# Altium PCB Copy of PCB1.PcbDoc
Units mm, origin at the board's own origin, x right, y up, seen from the top; angles counter-clockwise.
Board outline 235.2 x 133.73 mm, 2 copper layers (Top Layer, Bottom Layer); 78 components, 85 nets, 276 pads, 1 vias.
Unrouted connection lines stored in the file: 3.
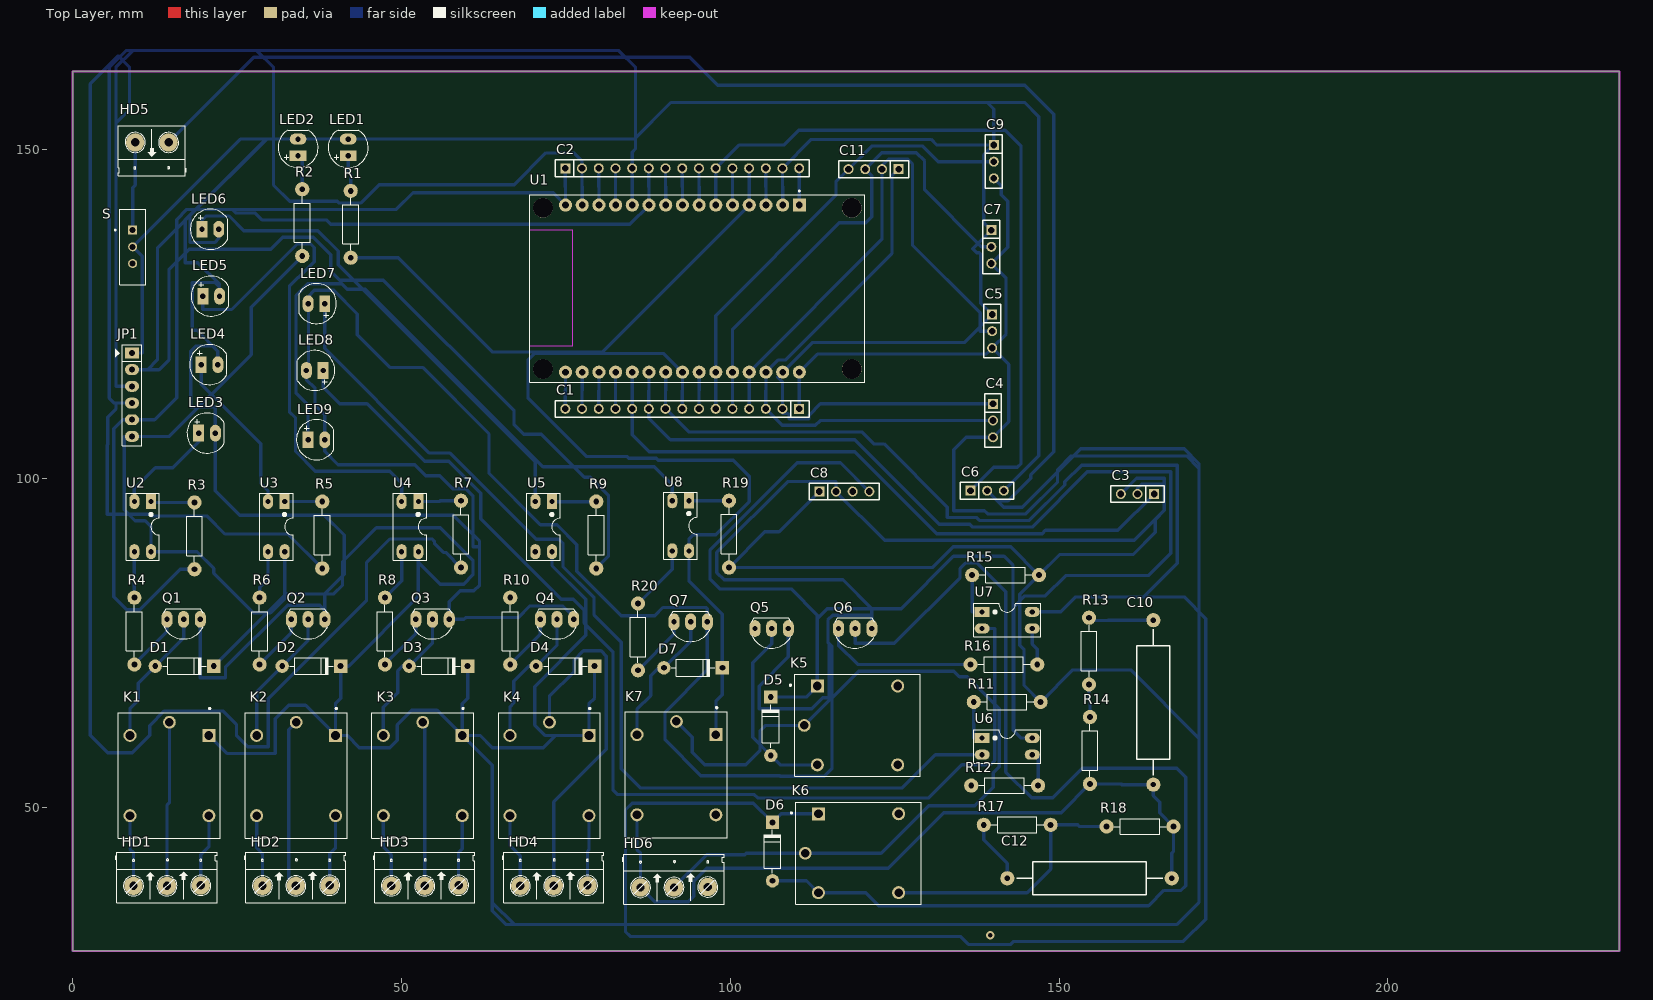
[diagram p0: Top Layer view]
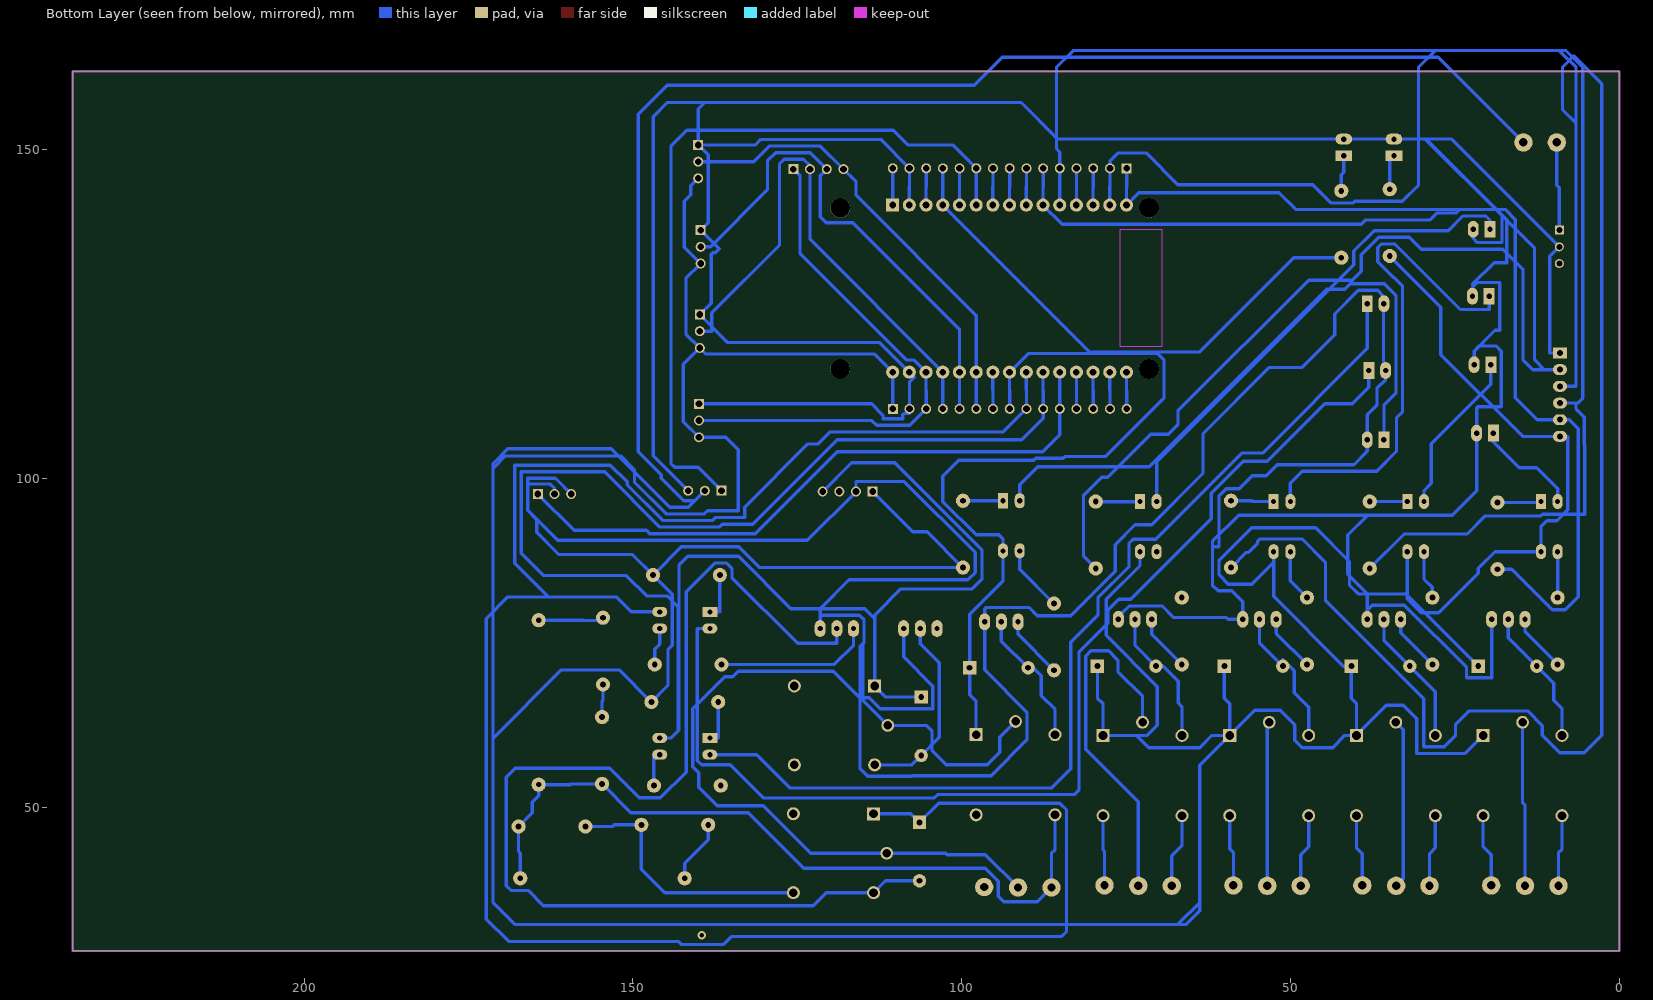
[diagram p1: Bottom Layer view, seen from below]

## Layer stack, top to bottom
Top Solder: solder mask 0.0102, Solder Resist, Dk 3.5
Top Layer: signal copper 0.0356
Dielectric 1: dielectric 0.32, FR-4, Dk 4.8
Bottom Layer: signal copper 0.0356
Bottom Solder: solder mask 0.0102, Solder Resist, Dk 3.5

## Board outline
0,28.194 235.204,28.194 235.204,161.925 0,161.925

## Design rules (kind name [scope] priority, off if disabled: settings)
Clearance [All] p1: gap=0.5 ignorepadtopadclearanceinfootprint=FALSE
PolygonConnect [All] p1: connectstyle=Relief reliefconductorwidth=0.254 reliefentries=4 polygonreliefangle="90 Angle" airgapwidth=0.254
RoomDefinition Sheet2 [InComponentClass('Sheet2')] p1: confinementstyle=ConfineIn formatcopy=TRUE lockcomponents=FALSE outline 236.347,29.718 243.84,29.718 243.84,42.164 236.347,42.164
RoutingLayers [All] p1: top layer_v5=FALSE bottom layer_v5=TRUE
RoutingVias [All] p1: holewidth=0.711 width=1.27 viastyle="Through Hole" minholewidth=0.711 minwidth=1.27 maxholewidth=0.711 maxwidth=1.27
SolderMaskExpansion [All] p1: expansion=0.102 istentingtop=FALSE
Width [All] p1: maxlimit=0.7 minlimit=0.3 preferedwidth=0.5
29 further rules are at their usual default settings.

## Components (designator, comment, footprint, x,y, rotation, side; value= is the part's Value field where it differs from the comment)
C1 "JP15" JP15-C1T 110.49,110.617 r180 top
C2 "JP15" JP15-C1T 74.93,147.193 r0 top
C3 "IR Remote" JP3-C1T 164.465,97.663 r180 top
C4 "Switch1" JP3-C1T 139.954,111.379 r270 top
C5 "Switch2" JP3-C1T 139.827,124.968 r270 top
C6 "DHT11" JP3-C1T 136.525,98.171 r0 top
C7 "Switch3" JP3-C1T 139.7,137.795 r270 top
C8 "GAS" JP4-C1T 113.538,98.044 r0 top
C9 "Switch4" JP3-C1T 140.081,150.749 r270 top
C10 "2.2uF/450V" Capacitor_CBB 164.338,53.486 r90 top value=220uF/450V
C11 "JP4" JP4-C1T 125.603,147.066 r180 top
C12 "3.3uF/450V" Capacitor_CBB 167.132,39.243 r180 top value=220uF/450V
D1 "1N4007" D1A 12.573,71.501 r180 top
D2 "1N4007" D1A 31.877,71.501 r180 top
D3 "1N4007" D1A 51.181,71.501 r180 top
D4 "1N4007" D1A 70.485,71.501 r180 top
D5 "1N4007" D1A 106.172,57.912 r270 top
D6 "1N4007" D1A 106.426,38.862 r270 top
D7 "1N4007" D1A 89.916,71.247 r180 top
HD1 "Header 3" HED3 9.271,38.1 r0 top
HD2 "Header 3" HED3 28.871,38.1 r0 top
HD3 "Header 3" HED3 48.472,38.1 r0 top
HD4 "Header 3" HED3 68.072,38.1 r0 top
HD5 "Header 2" HED2 14.605,151.13 r180 top
HD6 "Header 3" HED3 86.36,37.846 r0 top
JP1 "JP6 PIN" JP6 9.04,119.126 r270 top value=JP7
K1 "SRD-05VDC-SL-C" RELAY_SRD-05VDC-SL-C 14.732,54.864 r270 top
K2 "SRD-05VDC-SL-C" RELAY_SRD-05VDC-SL-C 33.994,54.864 r270 top
K3 "SRD-05VDC-SL-C" RELAY_SRD-05VDC-SL-C 53.255,54.864 r270 top
K4 "SRD-05VDC-SL-C" RELAY_SRD-05VDC-SL-C 72.517,54.864 r270 top
K5 "SRD-05VDC-SL-C" RELAY_SRD-05VDC-SL-C 119.352,62.484 r0 top
K6 "SRD-05VDC-SL-C" RELAY_SRD-05VDC-SL-C 119.507,43.053 r0 top
K7 "SRD-05VDC-SL-C" RELAY_SRD-05VDC-SL-C 91.821,54.991 r270 top
LED1 "LED_WIFI" "LED-5 GRe" 41.91,149.098 r90 top value="LED 3 ly Single Colour"
LED2 "LED_POWER" "LED-5 GRe" 34.29,149.098 r90 top value="LED 3 ly Single Colour"
LED3 "LED" "LED-5 GRe" 19.177,106.934 r0 top value="LED 3 ly Single Colour"
LED4 "LED_RELAY2_ON" "LED-5 GRe" 19.558,117.348 r0 top value="LED 3 ly Single Colour"
LED5 "LED" "LED-5 GRe" 19.812,127.762 r0 top value="LED 3 ly Single Colour"
LED6 "LED" "LED-5 GRe" 19.685,137.922 r0 top value="LED 3 ly Single Colour"
LED7 "LED" "LED-5 GRe" 38.354,126.619 r180 top value="LED 3 ly Single Colour"
LED8 "LED" "LED-5 GRe" 38.1,116.459 r180 top value="LED 3 ly Single Colour"
LED9 "LED" "LED-5 GRe" 35.814,105.918 r0 top value="LED 3 ly Single Colour"
Q1 "2SC1815" TO92-123 16.891,78.613 r180 top value=C1815
Q2 "2SC1815" TO92-123 35.814,78.613 r180 top value=C1815
Q3 "2SC1815" TO92-123 54.737,78.613 r180 top value=C1815
Q4 "2SC1815" TO92-123 73.66,78.613 r180 top value=C1815
Q5 "2SC1815" TO92-123 106.299,77.216 r180 top value=C1815
Q6 "2SC1815" TO92-123 118.999,77.216 r180 top value=C1815
Q7 "2SC1815" TO92-123 93.98,78.232 r180 top value=C1815
R1 "Res" RES-1/4W 42.164,138.303 r270 top
R2 "Res" RES-1/4W 34.798,138.557 r270 top
R3 "Res" RES-1/4W 18.415,90.932 r270 top
R4 "Res" RES-1/4W 9.271,76.454 r270 top
R5 "Res" RES-1/4W 37.846,91.059 r270 top
R6 "Res" RES-1/4W 28.321,76.454 r270 top
R7 "Res" RES-1/4W 58.928,91.186 r270 top
R8 "Res" RES-1/4W 47.371,76.454 r270 top
R9 "Res" RES-1/4W 79.502,91.059 r270 top
R10 "Res" RES-1/4W 66.421,76.454 r270 top
R11 "Res" RES-1/4W 141.732,66.167 r180 top
R12 "Res" RES-1/4W 141.351,53.467 r180 top
R13 "Res" RES-1/4W 154.686,74.168 r90 top
R14 "Res" RES-1/4W 154.559,58.293 r270 top
R15 "Res" RES-1/4W 141.478,85.471 r180 top
R16 "Res" RES-1/4W 141.224,71.882 r180 top
R17 "Res" RES-1/4W 143.256,47.498 r180 top
R18 "Res" RES-1/4W 162.687,46.99 r0 top
R19 "Res" RES-1/4W 99.949,91.948 r90 top
R20 "Res" RES-1/4W 85.852,75.565 r270 top
S "SS-12E17" SW_SS-12E17 9.144,135.255 r0 top
U1 "ESP32-DEVKIT-V1" MODULE_ESP32_DEVKIT_V1 94.996,128.905 r270 top
U2 "PC817" DIP4/W0.3 11.938,96.52 r180 top
U3 "PC817" DIP4/W0.3 32.258,96.52 r180 top
U4 "PC817" DIP4/W0.3 52.578,96.52 r180 top
U5 "PC817" DIP4/W0.3 72.898,96.52 r180 top
U6 "PC817" DIP4/W0.3 138.303,60.579 r270 top
U7 "PC817" DIP4/W0.3 138.303,79.756 r270 top
U8 "PC817" DIP4/W0.3 93.726,96.647 r180 top

## Footprints (in the part's own frame and the unit in brackets; to place one, negate y for a bottom-side part, rotate by r counter-clockwise, add the part's x,y. Pads: shape width x height; smd on the part's side, far side on the other; paste and mask are expansions set on the pad)
Capacitor_CBB [mil]
  round 85 hole 31.5: 1(0,0) 2(984.25,0)
  silkscreen extent 55,-98 929,98, body extent -51,-165 1031,170, height 649
D1A [mil] "Diode 1A, W 100mil, L 350mil"
  round 80 hole 35: 1(0,0)
  rect 80x80 hole 35: 2(-350,0)
  silkscreen extent -305,-50 -45,50, body extent -386,-33 34,36, height 84
DIP4/W0.3 [mil] "4 PIN, W 300mil, Pin to pin 100mil"
  rect 60x90 hole 31: 1(0,0)
  oval 60x90 hole 31: 2(100,0) 3(100,300) 4(0,300)
  silkscreen extent -50,-50 150,350, body extent -59,-10 159,305, height 170
HED2 [mil] "Header 2, 2 pin, hight 300mil, Pin to Pin 200, Colour Green"
  round 110 hole 50: 1(0,0) 2(200,0)
  silkscreen extent -106,-100 300,200, body extent -92,-140 302,155, height 394
HED3 [mil] "Header 3, 3 pin, hight 300mil, Pin to Pin 200, Colour Green"
  round 110 hole 50: 1(0,0) 2(200,0) 3(402.62,2.62)
  silkscreen extent -106,-100 500,200
JP3-C1T [mm] "3 row, straight, gold plating"
  rect 1.52x1.52 hole 1.02: 1(0,0)
  round 1.52 hole 1.02: 2(2.54,0) 3(5.08,0)
  silkscreen extent -1.52,-1.27 6.6,1.27, body extent -1.52,-1.25 6.6,1.25, height 8.51
JP4-C1T [mm] "4 row, straight, gold plating"
  rect 1.52x1.52 hole 1.02: 1(0,0)
  round 1.52 hole 1.02: 2(2.54,0) 3(5.08,0) 4(7.62,0)
  silkscreen extent -1.52,-1.27 9.14,1.27, body extent -1.52,-1.25 9.14,1.25, height 8.51
JP6 [mil] "JP6"
  rect 65x85 hole 36: 1(0,0)
  oval 65x85 hole 36: 2(100,0) 3(200,0) 4(300,0) 5(400,0) 6(500,0)
  silkscreen extent -50,-99 556,58, body extent -48,-50 548,48, height 323
JP15-C1T [mm] "15 row, straight, gold plating"
  rect 1.52x1.52 hole 1.02: 1(0,0)
  round 1.52 hole 1.02: 2(2.54,0) 3(5.08,0) 4(7.62,0) 5(10.16,0) 6(12.7,0) 7(15.24,0) 8(17.78,0) 9(20.32,0) 10(22.86,0) 11(25.4,0) 12(27.94,0) 13(30.48,0) 14(33.02,0) 15(35.56,0)
  silkscreen extent -1.52,-1.27 37.08,1.27, body extent -1.52,-1.25 36.58,1.25, height 8.51
"LED-5 GRe" [mil] "LED 2 PIN, 5 ly , Only colour,pin to pin 100mil"
  rect 65x100 hole 32: 1(0,0)
  oval 65x100 hole 32: 2(100,0)
  silkscreen extent -70,-120 154,120, body extent -54,-104 154,105, height 337
MODULE_ESP32_DEVKIT_V1 [mm]
  rect 2x2 / inner round 2 / far side rect 2x2 hole 1.02: 1(-12.7,15.515)
  round 2 hole 1.02: 2(-12.7,12.975) 3(-12.7,10.435) 4(-12.7,7.895) 5(-12.7,5.355) 6(-12.7,2.815) 7(-12.7,0.275) 8(-12.7,-2.265) 9(-12.7,-4.805) 10(-12.7,-7.345) 11(-12.7,-9.885) 12(-12.7,-12.425) 13(-12.7,-14.965) 14(-12.7,-17.505) 15(-12.7,-20.045) 16(12.7,-20.045) 17(12.7,-17.505) 18(12.7,-14.965) 19(12.7,-12.425) 20(12.7,-9.885) 21(12.7,-7.345) 22(12.7,-4.805) 23(12.7,-2.265) 24(12.7,0.275) 25(12.7,2.815) 26(12.7,5.355) 27(12.7,7.895) 28(12.7,10.435) 29(12.7,12.975) 30(12.7,15.515)
  round 3 hole 3 unplated: ""(-12.28,23.475) ""(-12.28,-23.475) ""(12.23,23.475) ""(12.23,-23.475)
  Keep-Out Layer region: 8.78,-25.475 -8.91,-25.475 -8.91,-18.985 8.78,-18.985
  Keep-Out Layer region: 8.78,-25.475 -8.91,-25.475 -8.91,-18.985 8.78,-18.985
  silkscreen extent -14.95,-25.47 14.23,25.47
RELAY_SRD-05VDC-SL-C [mm]
  rect 1.98x1.98 / inner round 1.98 / far side rect 1.98x1.98 hole 1.32: A1(-6.1,6)
  round 1.98 hole 1.32: A2(-6.1,-6) NC(6.1,6) NO(6.1,-6)
  round 1.935 hole 1.29: COM(-8.1,0)
  silkscreen extent -10.3,-7.75 9.55,7.75, body extent -9.6,-7.8 9.6,7.8, height 15.8
RES-1/4W [mil]
  round 85 hole 35: 1(-215,5) 2(185,5)
  silkscreen extent -173,-42 141,52, body extent -227,-42 197,52, height 95
SW_SS-12E17 [mm]
  rect 1.37x1.37 hole 0.91: 1(0,2.54)
  round 1.37 hole 0.91: 2(0,0) 3(0,-2.54)
  silkscreen extent -2.75,-5.75 2,5.75
TO92-123 [mil] "TO-92"
  oval 66x100 hole 32: 1(-100,0) 2(0,0) 3(100,0)
  silkscreen extent -117,-65 120,118, body extent -109,-66 109,95, height 245

## Part data
C1 C2: "WR-PHD 2.54 mm Angled Socket Header", Manufacturer="W¨¹rth Elektronik eiSos GmbH", partNo=613015143121, ComponentLink1 Description=Manufacturer, ComponentLink1URL=http://www.we-online.com, ComponentLink2 Description=Datasheet, ComponentLink2URL=http://katalog.we-online.de/em/datasheet/6130xx143121.pdf, Created by="Karrer Zheng", Created Date="29 March 2013", NoPins=15
C3 C4 C5 C6 C7 C9: library part JP3, "WR-PHD 2.54 mm Angled Socket Header", Manufacturer="W¨¹rth Elektronik eiSos GmbH", partNo=613003143121, ComponentLink1 Description=Manufacturer, ComponentLink1URL=http://www.we-online.com, ComponentLink2 Description=Datasheet, ComponentLink2URL=http://katalog.we-online.de/em/datasheet/6130xx143121.pdf, Created by="Karrer Zheng", Created Date="29 March 2013", NoPins=03
C8: library part JP4, "WR-PHD 2.54 mm Angled Socket Header", Manufacturer="W¨¹rth Elektronik eiSos GmbH", partNo=613004143121, ComponentLink1 Description=Manufacturer, ComponentLink1URL=http://www.we-online.com, ComponentLink2 Description=Datasheet, ComponentLink2URL=http://katalog.we-online.de/em/datasheet/6130xx143121.pdf, Created by="Karrer Zheng", Created Date="29 March 2013", NoPins=04
C10 C12: library part CP9, "Cap 10000uF/63V"
C11: "WR-PHD 2.54 mm Angled Socket Header", Manufacturer="W¨¹rth Elektronik eiSos GmbH", partNo=613004143121, ComponentLink1 Description=Manufacturer, ComponentLink1URL=http://www.we-online.com, ComponentLink2 Description=Datasheet, ComponentLink2URL=http://katalog.we-online.de/em/datasheet/6130xx143121.pdf, Created by="Karrer Zheng", Created Date="29 March 2013", NoPins=04
D1 D2 D3 D4 D5 D6 D7: library part D1A, "Diode 1A"
HD1 HD2 HD3 HD4 HD6: library part Hed3, "Header 3 (Green)"
HD5: library part Hed2, "Header 2 (Green)"
JP1: library part JP6
K1 K2 K3 K4 K5 K6 K7: "5V Trigger Relay Module For Arduino And Raspberry Pi 5V Trigger Relay Module For Arduino And Raspberry Pi", Package="NON STANDARD-5 Songle Relay", Availability="Not in stock", Check_prices=https://www.snapeda.com/parts/SRD-05VDC-SL-C/Songle+Relay/view-part/?ref=eda, MF="Songle Relay", MP=SRD-05VDC-SL-C, Price=None, SnapEDA_Link=https://www.snapeda.com/parts/SRD-05VDC-SL-C/Songle+Relay/view-part/?ref=snap
LED1 LED2 LED4: library part LED, "LED Single colour Green and Red"
LED3 LED5 LED6 LED7 LED8 LED9: "LED Single colour Green and Red"
Q1 Q2 Q3 Q4 Q5 Q6 Q7: "NPN 600mW, ECB"
R1 R2 R3 R4 R5 R6 R7 R8 R9 R10 R11 R12 R13 R14 R15 R16 R17 R18 R19 R20: Manufacturer="Generic Components", Class=Passive, Published=08/06/2000, Publisher="Altium Hobart Technology Centre", SubClass=R
S: "3-Pin SPDT Slide Switch", Package=None, Availability=Unavailable, MF="Jameco Valuepro", MP=SS-12E17, Price=None, SnapEDA_Link=https://www.snapeda.com/parts/SS-12E17/Jameco%20Valuepro/view-part/842561/?ref=snap
U1: "Dual core, Wi-Fi: 2.4 GHz up to 150 Mbits/s,BLE (Bluetooth Low Energy) and legacy Bluetooth, 32 bits, Up to 240 MHz", Package=None, Availability="Not in stock", Check_prices=https://www.snapeda.com/parts/ESP32-DEVKIT-V1/Do+it/view-part/?ref=eda, MF="Do it", MP=ESP32-DEVKIT-V1, Price=None, SnapEDA_Link=https://www.snapeda.com/parts/ESP32-DEVKIT-V1/Do+it/view-part/?ref=snap
U2 U3 U4 U5 U6 U7 U8: "Single Opto"

## Via types
v1: diameter 1.27, hole 0.711, Top Layer to Bottom Layer, 1 vias

## Nets (pads, with @x,y where several pads share a name; then routed paths per layer and width w, separated by ;. In a path a pad name is that pad's centre, name@x,y a point inside that pad or via, vN(x,y) a via of type N, cw(c..) or ccw(c..) an arc to the next point about the centre after c; other vN are vias at no path point)
3.3V: C2.15 U1.1 | length 5.6
  Bottom Layer w0.5: C2.15 110.49,144.395 110.511,144.374 U1.1
D2: C2.12 R1.2 U1.4 | length 81.4
  Bottom Layer w0.5: R1.2 49.556,133.604 63.907,119.253 80.539,119.253 U1.4 102.891,144.374 102.87,144.395 C2.12
D4: C2.11 U1.5 | length 5.6
  Bottom Layer w0.5: C2.11 100.33,144.395 100.351,144.374 U1.5
D5: C2.8 U1.8 | length 5.6
  Bottom Layer w0.5: C2.8 92.71,144.395 92.731,144.374 U1.8
D12: C1.4 C5.2 C11.2 U1.27 | length 82.2
  Bottom Layer w0.5: C1.4 102.87,113.386 102.891,113.407 U1.27 123.063,136.377 C11.2 123.063,147.574 124.065,148.576 127,148.576 127.711,147.865 127.711,135.509 138.024,125.197 138.024,122.428 C5.2
D13: C1.3 C4.2 C11.1 U1.28 | length 81.4
  Bottom Layer w0.5: C11.1 124.587,146.05 124.587,134.235 108.386,118.034 107.26,118.034 U1.28 105.431,114.3 105.431,113.407 105.41,113.386 C1.3 107.92,108.107 112.954,108.107 113.686,108.839 C4.2
D14: C1.5 C7.2 C11.3 U1.26 | length 76.8
  Bottom Layer w0.5: C1.5 100.33,113.386 100.351,113.407 U1.26 100.351,122.703 116.561,138.913 120.625,138.913 121.539,139.827 121.539,146.05 C11.3 123.038,149.581 128.27,149.581 129.54,148.311 129.54,143.916 138.201,135.255 C7.2
D15: C2.13 U1.3 | length 5.6
  Bottom Layer w0.5: C2.13 105.41,144.395 105.431,144.374 U1.3
D18: C2.7 U1.9 | length 5.6
  Bottom Layer w0.5: C2.7 90.17,144.395 90.191,144.374 U1.9
D19: C2.6 JP1.2 R9.2 U1.10 | length 226
  Bottom Layer w0.5: R9.2 81.483,88.214 81.483,97.485 78.74,100.228 77.826,100.228 71.298,106.756 68.58,106.756 67.132,108.204 67.132,110.312 47.269,130.175 40.64,130.175 39.268,131.547 39.268,134.061 36.627,136.703 31.953,136.703 30.152,134.902 17.732,134.902 14.681,131.851 14.681,118.11 13.157,116.586 JP1.2 11.43,116.586 12.903,118.059 12.903,135.052 18.796,140.945 24.257,140.945 24.79,140.411 27.737,140.411 28.804,139.344 38.608,139.344 39.243,138.709 84.755,138.709 U1.10 87.651,144.374 87.63,144.395 C2.6
D21: C2.5 JP1.3 R7.2 U1.11 | length 399.5
  Bottom Layer w0.5: R7.2 56.747,88.795 56.4,88.795 55.024,90.17 55.024,90.518 54.712,90.83 48.26,90.83 44.704,87.274 44.704,81.509 29.743,66.548 29.743,59.224 26.653,59.224 24.917,60.96 24.917,62.636 22.86,64.694 13.97,64.694 11.735,62.459 11.735,60.96 9.093,58.318 5.334,58.318 2.692,60.96 2.692,160.02 6.947,164.274 8.661,162.56 8.661,156.134 6.604,154.076 6.604,114.046 ; U1.11 85.111,144.374 85.09,144.395 C2.5 85.09,149.657 85.598,150.165 85.598,162.56 83.058,165.1 9.144,165.1 6.604,162.56 6.604,114.046 ; 6.604,114.046 JP1.3 6.604,114.046
D22: C2.2 JP1.4 R5.2 U1.14 | length 213.4
  Bottom Layer w0.5: R5.2 32.741,91.592 23.165,91.592 20.422,94.336 11.938,94.336 11.659,94.615 5.283,94.615 5.283,105.131 5.359,105.207 5.359,109.347 6.604,110.592 6.604,111.506 JP1.4 6.35,111.506 5.588,112.268 5.588,162.56 8.128,165.1 28.016,165.1 30.556,162.56 30.556,144.653 33.045,142.164 40.233,142.164 40.462,141.934 43.865,141.934 46.634,144.704 67.158,144.704 71.984,149.53 76.2,149.53 77.47,148.26 C2.2 77.47,144.395 77.491,144.374 U1.14
D23: C2.1 JP1.5 R3.2 U1.15 | length 147
  Bottom Layer w0.5: R3.2 16.363,86.233 10.194,80.065 8.277,80.065 6.275,82.066 6.275,107.621 7.62,108.966 JP1.5 12.471,108.966 15.824,112.319 15.824,139.395 17.374,140.945 39.461,140.945 39.472,140.934 49.24,140.934 51.765,143.459 73.097,143.459 U1.15 74.951,144.374 74.93,144.395 C2.1
D25: C1.8 D7.2 K7.A1 U1.23 U8.4 | length 122.6
  Bottom Layer w0.5: C1.8 92.71,113.386 92.731,113.407 U1.23 89.912,119.024 70.18,119.024 69.266,118.11 69.266,112.243 78.117,103.391 84.296,103.391 84.588,103.099 88.763,103.099 89.039,102.823 100.454,102.823 102.87,100.406 102.87,96.52 97.825,91.475 94.396,91.475 93.726,90.805 U8.4 93.726,84.461 98.806,79.381 D7.2 98.806,67.152 97.821,66.167 K7.A1
D26: C1.7 U1.24 | length 5.6
  Bottom Layer w0.5: C1.7 95.25,113.386 95.271,113.407 U1.24
D27: C1.6 C9.2 C11.4 U1.25 | length 69.3
  Bottom Layer w0.5: C1.6 97.79,113.386 97.811,113.407 U1.25 97.811,124.81 116.078,143.077 116.078,145.161 C11.4 121.498,150.581 129.261,150.581 131.632,148.209 C9.2
D32: C1.10 C8.4 D5.2 K5.A1 U1.21 U6.4 | length 304.6
  Bottom Layer w0.5: U1.21 87.651,113.407 87.63,113.386 C1.10 87.63,109.22 90.907,105.943 118.948,105.943 131.801,93.091 136.437,93.091 136.881,92.647 145.9,92.647 154.304,101.051 166.989,101.051 166.989,88.681 163.576,85.268 151.028,85.268 147.93,82.169 144.78,82.169 143.154,80.543 143.154,61.57 144.145,60.579 ; D5.2 111.57,66.802 K5.A1 ; C8.4 116.764,102.438 110.202,102.438 96.926,89.162 96.926,84.684 98.374,83.236 109.264,83.236 113.252,79.248 K5.A1 ; K5.A1 113.252,78.74 114.751,80.239 125.984,80.239 133.934,88.189 141.63,88.189 143.002,86.817 143.002,61.722 144.145,60.579 ; 144.145,60.579 U6.4 144.145,60.579
D33: C1.9 D6.2 K6.A1 U1.22 U7.4 | length 350.2
  Bottom Layer w0.5: U1.22 90.191,113.407 90.17,113.386 C1.9 93.68,107.107 119.99,107.107 121.819,105.279 123.388,105.279 132.984,95.683 132.984,94.114 137.425,94.114 137.892,93.647 145.486,93.647 150.88,99.041 150.88,99.518 153.413,102.051 167.989,102.051 167.989,87.141 162.871,82.023 152.508,82.023 ; K6.A1 107.727,49.053 D6.2 103.53,50.648 85.09,50.648 84.074,49.632 84.074,31.115 84.785,30.404 135.001,30.404 136.22,29.185 142.672,29.185 143.129,29.642 168.91,29.642 172.288,33.02 172.288,78.74 169.012,82.017 154.762,82.017 154.762,82.023 152.508,82.023 ; 150.241,79.756 152.508,82.023 ; 150.241,79.756 U7.4 150.241,79.756 ; 150.241,79.756 152.508,82.023
D34: C1.12 U1.19 | length 5.6
  Bottom Layer w0.5: C1.12 82.55,113.386 82.571,113.407 U1.19
D35: C1.11 C3.1 U1.20 | length 97.6
  Bottom Layer w0.5: U1.20 85.111,113.407 85.09,113.386 C1.11 85.09,106.68 87.655,104.115 118.914,104.115 131.381,91.647 147.432,91.647 147.932,92.147 158.949,92.147 C3.1
EN: C1.15 U1.16 | length 5.6
  Bottom Layer w0.5: C1.15 74.93,113.386 74.951,113.407 U1.16
FAN_COM: HD6.2 K5.COM K6.COM K7.COM | length 130.3
  Bottom Layer w0.5: HD6.2 96.418,42.824 102.21,42.824 102.438,43.053 K6.COM 122.936,43.053 130.15,50.267 137.16,50.267 139.979,53.086 139.979,55.296 140.894,56.21 140.894,65.049 136.042,69.901 134.849,69.901 134.01,70.739 119.507,70.739 K5.COM 105.41,62.484 104.521,61.595 104.521,58.649 102.387,56.515 96.114,56.515 94.209,58.42 94.209,60.703 K7.COM
FAN_NO: C10.1 C12.1 HD6.1 K7.NO R14.2 R18.2 | length 114.5
  Bottom Layer w0.5: K7.NO 85.821,43.617 86.36,43.078 HD6.1 88.519,35.687 93.599,35.687 94.44,36.528 94.44,38.802 96.405,40.767 124.028,40.767 132.486,49.225 150.317,49.225 R14.2 159.436,53.594 159.544,53.486 C10.1 164.338,51.816 165.315,50.839 165.315,49.188 R18.2 167.386,43.307 167.132,43.053 C12.1
GND: C1.2 C2.14 C3.2 C4.1 C5.1 C6.3 C7.1 C8.2 C9.1 JP1.1 LED1.2 LED2.2 LED3.2 LED4.2 LED5.2 LED6.2 LED7.2 LED8.2 LED9.2 Q1.1 Q2.1 Q3.1 Q4.1 Q5.1 Q6.1 Q7.1 S.2 U1.2 U1.29 | length 1169.9
  Bottom Layer w0.5: JP1.1 10.592,119.126 10.592,133.807 S.2 25.527,151.638 LED2.2 ; Q1.1 19.431,69.723 23.241,69.723 23.241,71.323 32.69,80.772 37.592,80.772 38.354,80.01 Q2.1 38.354,82.474 41.326,85.446 41.326,91.44 38.303,94.463 25.4,94.463 ; LED6.2 22.225,136.537 21.59,135.902 17.856,135.902 17.856,139.954 29.54,151.638 ; Q4.1 76.2,79.633 75.565,79.633 74.553,80.645 69.52,80.645 67.767,78.892 59.792,78.892 59.512,78.613 58.218,78.613 Q3.1 ; U1.2 107.971,144.374 107.95,144.395 C2.14 112.338,151.581 130.531,151.581 131.362,150.749 C9.1 ; Q5.1 108.839,72.898 104.406,68.465 104.406,65.024 112.395,65.024 114.071,66.7 115.011,66.7 115.011,74.981 114.859,75.133 ; C4.1 113.716,111.379 111.989,109.652 111.989,109.107 108.991,109.107 108.991,109.703 108.788,109.906 107.95,109.906 C1.2 107.95,114.66 107.188,115.422 U1.29 112.467,120.701 135.56,120.701 C5.1 138.1,126.695 138.1,134.112 137.846,134.366 137.49,134.366 136.881,134.976 C7.1 138.558,138.937 138.558,149.226 C9.1 ; C6.3 145.237,101.803 146.914,103.48 146.914,155.067 144.78,157.201 90.983,157.201 ; C3.2 161.925,98.552 162.56,99.187 165.989,99.187 165.989,95.174 161.462,90.647 123.475,90.647 C8.2 116.078,99.568 108.746,99.568 97.968,88.789 97.968,85.725 99.06,84.633 117.145,84.633 121.539,80.239 Q6.1 ; 21.717,98.146 LED3.2 ; 21.717,98.146 25.4,94.463 ; 21.717,98.146 LED3.2 ; 21.717,98.146 25.4,94.463 ; LED3.2 21.717,110.769 21.565,110.922 17.958,110.922 17.958,119.38 18.771,120.193 21.285,120.193 22.098,119.38 ; 22.098,119.38 LED4.2 22.098,119.38 ; 22.098,119.38 18.923,122.555 18.212,122.555 18.212,129.845 21.59,129.845 22.352,129.083 ; 22.352,129.083 LED5.2 22.352,129.083 ; 22.352,129.083 22.123,129.311 22.352,129.54 19.05,132.842 17.12,132.842 17.12,139.37 29.388,151.638 29.464,151.562 29.54,151.638 ; 25.4,94.463 57.887,94.463 61.885,90.465 61.885,83.82 ; 29.54,151.638 LED2.2 ; 29.54,151.638 LED2.2 ; LED2.2 38.1,151.638 LED1.2 ; LED1.2 85.42,151.638 ; LED1.2 85.42,151.638 ; Q3.1 57.277,81.28 ; Q3.1 57.277,81.28 ; 57.277,81.28 58.953,82.956 ; 57.277,81.28 58.953,82.956 ; 58.953,82.956 61.021,82.956 ; 58.953,82.956 61.021,82.956 ; 61.021,82.956 61.885,83.82 ; 61.021,82.956 61.885,83.82 ; 61.885,83.82 61.885,89.663 60.885,89.663 60.885,97.405 59.813,98.477 57.81,98.477 55.829,100.457 53.687,100.457 52.011,102.133 40.361,102.133 38.354,104.14 LED9.2 38.354,109.701 36.88,111.176 36.88,113.739 35.56,115.059 LED8.2 35.56,117.479 35.887,117.806 35.887,125.599 35.814,125.599 LED7.2 35.814,127.699 36.754,128.639 39.712,128.639 43.307,125.044 43.307,121.869 48.26,116.916 53.213,116.916 63.322,106.807 63.322,100.813 71.145,92.989 73.66,92.989 76.683,89.967 76.683,85.916 83.427,79.172 88.519,79.172 89.764,80.416 96.342,80.416 96.52,80.239 Q7.1 96.52,70.917 90.094,64.491 90.094,60.274 95.53,54.839 107.518,54.839 107.62,54.737 114.325,54.737 115.468,55.88 115.468,74.524 114.859,75.133 ; 85.42,151.638 90.983,157.201 ; 85.42,151.638 90.983,157.201 ; 90.983,157.201 139.09,157.201 140.081,156.21 C9.1 ; 114.859,75.133 114.859,78.525 ; 114.859,75.133 114.859,78.525 ; 114.859,78.525 115.57,79.236 ; 114.859,78.525 115.57,79.236 ; 115.57,79.236 121.539,79.236 ; 115.57,79.236 121.539,79.236 ; Q6.1 121.539,79.236 ; Q6.1 121.539,79.236
NetC10_2: C10.2 R13.2 | length 10
  Bottom Layer w0.5: R13.2 154.98,78.446 157.389,78.446 157.429,78.486 C10.2
NetC12_2: C12.2 R17.2 | length 9.6
  Bottom Layer w0.5: R17.2 138.557,45.079 142.132,41.504 C12.2
NetD1_1: D1.1 K1.A2 Q1.2 | length 21
  Bottom Layer w0.5: K1.A2 8.732,65.044 10.002,66.314 10.002,68.93 D1.1 16.891,75.819 Q1.2
NetD2_1: D2.1 K2.A2 Q2.2 | length 20.9
  Bottom Layer w0.5: K2.A2 27.994,67.618 D2.1 35.814,75.438 Q2.2
NetD3_1: D3.1 K3.A2 Q3.2 | length 22.7
  Bottom Layer w0.5: K3.A2 47.255,65.239 49.454,67.437 49.454,70.764 51.181,72.492 D3.1 54.737,75.057 Q3.2
NetD4_1: D4.1 K4.A2 Q4.2 | length 21.3
  Bottom Layer w0.5: K4.A2 66.517,65.349 67.069,65.901 67.069,69.203 69.367,71.501 D4.1 73.66,74.676 Q4.2
NetD5_1: D5.1 K5.A2 Q5.2 | length 29.3
  Bottom Layer w0.5: Q5.2 106.299,74.905 103.403,72.009 103.403,60.681 D5.1 107.6,56.484 K5.A2
NetD6_1: D6.1 K6.A2 Q6.2 | length 173.8
  Bottom Layer w0.5: D6.1 111.598,38.862 K6.A2 120.599,37.053 122.6,35.052 163.599,35.052 165.945,37.398 168.538,37.398 169.24,38.1 169.24,54.61 167.894,55.956 153.518,55.956 149.047,51.486 145.821,51.486 141.91,55.397 141.91,82.801 137.537,87.174 135.763,87.174 134.949,86.36 134.949,84.962 124.968,74.981 118.999,74.981 Q6.2
NetD7_1: D7.1 K7.A2 Q7.2 | length 22.1
  Bottom Layer w0.5: K7.A2 85.821,64.917 87.935,67.031 87.935,70.053 89.916,72.034 D7.1 93.98,75.311 Q7.2
NetHD1_2: HD1.2 K1.COM | length 25
  Bottom Layer w0.5: HD1.2 14.351,50.317 14.732,50.698 K1.COM
NetHD1_3: HD1.3 K1.NC | length 11.1
  Bottom Layer w0.5: HD1.3 19.498,42.824 20.732,44.059 K1.NC
NetHD2_2: HD2.2 K2.COM | length 25.8
  Bottom Layer w0.5: HD2.2 32.893,39.158 32.893,61.863 K2.COM
NetHD2_3: HD2.3 K2.NC | length 11
  Bottom Layer w0.5: HD2.3 39.098,43.002 39.994,43.898 K2.NC
NetHD3_2: HD3.2 K3.COM | length 25
  Bottom Layer w0.5: K3.COM 53.552,62.668 HD3.2
NetHD3_3: HD3.3 K3.NC | length 10.8
  Bottom Layer w0.5: HD3.3 58.698,43.18 59.255,43.737 K3.NC
NetHD4_2: HD4.2 K4.COM | length 55
  Bottom Layer w0.5: K4.COM 72.517,66.94 76.258,70.68 76.258,72.39 77.687,73.819 80.359,73.819 81.153,73.025 81.153,58.852 73.152,50.851 HD4.2
NetHD4_3: HD4.3 K4.NC | length 10.7
  Bottom Layer w0.5: HD4.3 78.298,43.332 78.517,43.551 K4.NC
NetHD5_2: HD5.2 S.1 | length 13.5
  Bottom Layer w0.5: S.1 9.144,144.272 9.525,144.653 HD5.2
NetK5_NO: K5.NO R13.1 R14.1 | length 5
  Bottom Layer w0.5: R13.1 154.559,66.294 154.686,66.167 R14.1
NetK6_NO: K6.NO R17.1 R18.1 | length 39.9
  Bottom Layer w0.5: K6.NO 145.13,37.053 148.717,40.64 R17.1 152.832,47.371 153.086,47.117 R18.1
NetLED1_1: LED1.1 R1.1 | length 5.5
  Bottom Layer w0.5: LED1.1 41.91,146.609 42.291,146.228 R1.1
NetLED2_1: LED2.1 R2.1 | length 5.7
  Bottom Layer w0.5: LED2.1 34.925,149.098 R2.1
NetLED3_1: LED3.1 U2.2 | length 16
  Bottom Layer w0.5: U2.2 9.398,98.476 12.598,101.676 15.24,101.676 19.177,105.613 LED3.1
NetLED4_1: LED4.1 U3.2 | length 25
  Bottom Layer w0.5: LED4.1 19.558,114.351 28.6,105.308 28.6,99.314 29.718,98.196 U3.2
NetLED5_1: LED5.1 U4.2 | length 77.3
  Bottom Layer w0.5: LED5.1 19.812,125.728 24.177,125.728 34.137,135.688 36.22,135.688 36.755,135.153 36.755,132.978 34.378,130.601 34.29,130.601 32.984,129.296 32.984,110.176 33.899,109.261 33.899,104.14 36.922,101.117 48.26,101.117 50.038,99.339 U4.2
NetLED6_1: LED6.1 U5.2 | length 75.1
  Bottom Layer w0.5: LED6.1 19.685,139.307 20.32,139.942 23.8,139.942 26.023,137.719 37.313,137.719 40.411,134.62 40.411,132.537 70.358,102.591 U5.2
NetLED7_1: LED7.1 U6.2 | length 151.4
  Bottom Layer w0.5: LED7.1 38.354,119.812 54.27,103.895 57.395,103.895 70.485,90.805 73.939,90.805 74.574,90.17 74.574,86.61 79.302,81.883 79.302,79.271 83.42,75.152 83.42,55.88 86.322,52.978 126.141,52.978 131.202,58.039 U6.2
NetLED8_1: LED8.1 U7.2 | length 170.6
  Bottom Layer w0.5: LED8.1 38.1,113.919 40.64,111.379 44.78,111.379 53.518,102.641 57.226,102.641 62.078,97.79 62.078,93.904 74.32,81.661 76.149,81.661 77.8,80.01 77.8,78.054 82.169,73.685 82.169,52.705 82.896,51.978 103.648,51.978 104.165,51.46 130.175,51.46 135.23,56.515 139.573,56.515 140.208,57.15 140.208,77.216 U7.2
NetLED9_1: LED9.1 U8.2 | length 95.7
  Bottom Layer w0.5: LED9.1 35.814,111.176 33.984,113.005 33.984,127.862 35.761,129.639 40.93,129.639 41.766,128.803 44.527,128.803 71.526,101.803 88.443,101.803 91.186,99.06 U8.2
NetQ1_3: Q1.3 R4.2 | length 8.9
  Bottom Layer w0.5: R4.2 14.351,76.708 Q1.3
NetQ2_3: Q2.3 R6.2 | length 8.9
  Bottom Layer w0.5: R6.2 33.274,76.581 Q2.3
NetQ3_3: Q3.3 R8.2 | length 8.8
  Bottom Layer w0.5: R8.2 52.197,76.454 Q3.3
NetQ4_3: Q4.3 R10.2 | length 8.8
  Bottom Layer w0.5: R10.2 71.12,76.327 Q4.3
NetQ5_3: Q5.3 R12.2
NetQ6_3: Q6.3 R16.2 | length 23.8
  Bottom Layer w0.5: Q6.3 116.459,74.676 119.38,71.755 R16.2
NetQ7_3: Q7.3 R20.2 | length 9.6
  Bottom Layer w0.5: R20.2 91.44,76.327 Q7.3
NetR3_1: R3.1 U2.1 | length 6.7
  Bottom Layer w0.5: U2.1 11.938,96.393 R3.1
NetR4_1: R4.1 U2.3 | length 7
  Bottom Layer w0.5: R4.1 9.398,85.395 U2.3
NetR5_1: R5.1 U3.1 | length 5.7
  Bottom Layer w0.5: U3.1 35.103,96.52 R5.1
NetR6_1: R6.1 U3.3 | length 7.5
  Bottom Layer w0.5: R6.1 28.448,83.475 29.718,84.745 U3.3
NetR7_1: R7.1 U4.1 | length 6.5
  Bottom Layer w0.5: U4.1 55.753,96.52 55.88,96.647 R7.1
NetR8_1: R8.1 U4.3 | length 8
  Bottom Layer w0.5: R8.1 50.038,84.455 U4.3
NetR9_1: R9.1 U5.1 | length 6.8
  Bottom Layer w0.5: U5.1 72.898,96.485 78.927,96.485 78.927,96.52 R9.1
NetR10_1: R10.1 U5.3
NetR11_2: R11.2 U6.1 | length 6.7
  Bottom Layer w0.5: R11.2 137.033,60.579 U6.1
NetR12_1: R12.1 U6.3 | length 5.6
  Bottom Layer w0.5: U6.3 146.812,58.039 R12.1
NetR15_2: R15.2 U7.1 | length 7.1
  Bottom Layer w0.5: R15.2 136.779,79.756 U7.1
NetR16_1: R16.1 U7.3 | length 5.8
  Bottom Layer w0.5: U7.3 145.923,74.854 146.685,74.092 R16.1
NetR19_2: R19.2 U8.1 | length 6.1
  Bottom Layer w0.5: U8.1 96.774,96.647 R19.2
NetR20_1: R20.1 U8.3 | length 10.2
  Bottom Layer w0.5: R20.1 91.186,86.233 U8.3
NO1: HD1.1 K1.NO | length 10.9
  Bottom Layer w0.5: K1.NO 8.732,43.694 9.271,43.155 HD1.1
NO2: HD2.1 K2.NO | length 11
  Bottom Layer w0.5: K2.NO 27.994,43.854 28.871,42.977 HD2.1
NO3: HD3.1 K3.NO | length 11.2
  Bottom Layer w0.5: K3.NO 47.255,44.015 48.472,42.799 HD3.1
NO4: HD4.1 K4.NO | length 11.3
  Bottom Layer w0.5: K4.NO 66.517,44.202 68.072,42.647 HD4.1
RX0: C2.4 U1.12 | length 5.6
  Bottom Layer w0.5: C2.4 82.55,144.395 82.571,144.374 U1.12
RX2: C2.10 C6.1 U1.6 | length 113.1
  Bottom Layer w0.5: U1.6 97.811,144.374 97.79,144.395 C2.10 101.321,150.724 108.153,150.724 110.414,152.984 141.783,152.984 144.221,150.546 144.221,102.311 143.637,101.727 140.081,101.727 C6.1
TX0: C2.3 U1.13 | length 5.6
  Bottom Layer w0.5: C2.3 80.01,144.395 80.031,144.374 U1.13
TX2: C2.9 U1.7 | length 5.6
  Bottom Layer w0.5: C2.9 95.25,144.395 95.271,144.374 U1.7
VIN: C1.1 C3.3 C4.3 C5.3 C6.2 C7.3 C8.1 C9.3 D1.2 D2.2 D3.2 D4.2 HD5.1 JP1.6 K1.A1 K2.A1 K3.A1 K4.A1 R2.2 R11.1 R15.1 R19.1 U1.30 U2.4 U3.4 U4.4 U5.4 | length 1461.5
  Bottom Layer w0.5: HD5.1 27.575,164.1 93.824,164.1 98.107,159.817 144.78,159.817 149.174,155.423 149.174,104.064 145.676,100.566 145.676,100.083 142.24,96.647 140.589,96.647 C6.2 141.58,95.656 144.399,95.656 153.314,104.572 169.012,104.572 171.272,102.311 171.272,35.56 ; K1.A1 23.472,58.224 30.81,58.224 30.81,63.5 32.842,65.532 35.426,65.532 K2.A1 ; D1.2 32.258,82.296 U3.4 ; R2.2 27.153,126.086 27.153,118.872 14.707,106.426 JP1.6 7.874,106.426 7.874,95.25 9.497,93.627 11.021,93.627 11.938,92.71 U2.4 18.923,88.9 21.463,86.36 21.463,85.649 27.508,79.604 30.107,79.604 32.258,81.754 U3.4 ; D3.2 60.071,66.627 59.255,65.811 K3.A1 ; U5.4 72.898,86.792 78.029,81.661 78.029,76.175 70.256,68.402 70.256,62.535 71.827,60.964 K4.A1 ; D4.2 79.375,66.644 78.517,65.786 K4.A1 ; C1.1 110.49,115.291 110.511,115.291 U1.30 113.254,118.948 138.887,118.948 C5.3 ; C8.1 107.418,91.924 105.259,91.924 R19.1 130.745,86.487 133.905,89.647 142.636,89.647 R15.1 ; C9.3 141.186,144.564 141.186,143.196 142.189,142.193 142.189,135.204 C7.3 141.935,130.48 141.935,121.996 C5.3 ; C3.3 161.773,100.051 165.989,100.051 165.989,95.174 164.607,93.792 164.607,91.836 161.239,88.468 150.063,88.468 R15.1 ; U3.4 32.258,82.753 32.537,82.474 39.7,82.474 41.046,83.82 41.046,87.401 46.203,92.558 55.931,92.558 60.885,87.604 60.885,85.37 59.487,83.972 55.88,83.972 52.578,87.274 U4.4 52.578,82.118 41.961,71.501 D2.2 40.767,66.61 39.994,65.837 K2.A1 ; K2.A1 41.754,60.964 43.612,59.106 48.26,59.106 49.352,60.198 49.352,62.56 51.587,64.795 55.424,64.795 K3.A1 ; K3.A1 63.805,56.415 ; K3.A1 63.805,56.415 ; K3.A1 63.805,56.415 ; K3.A1 61.951,60.964 63.809,59.106 71.577,59.106 73.435,60.964 K4.A1 ; 63.805,35.56 63.805,56.415 ; 63.805,35.56 67.132,32.233 ; 63.805,35.56 63.805,56.415 ; 63.805,35.56 67.132,32.233 ; 63.805,56.415 63.805,34.29 65.862,32.233 167.945,32.233 ; 67.132,32.233 167.945,32.233 ; 67.132,32.233 167.945,32.233 ; C5.3 142.343,117.372 142.343,108.688 C4.3 135.89,106.299 134.001,104.41 134.001,95.114 138.659,95.114 139.125,94.647 144.932,94.647 149.758,99.473 149.758,101.346 151.867,103.454 169.418,103.454 171.272,101.6 171.272,35.56 ; R15.1 144.018,82.423 144.018,74.651 144.678,73.99 144.678,68.555 R11.1 152.07,70.917 160.909,70.917 171.272,60.554 171.272,35.56 ; 167.945,32.233 171.272,35.56 ; 167.945,32.233 171.272,35.56 ; 167.945,32.233 171.272,35.56
VN: C1.13 U1.18 | length 5.6
  Bottom Layer w0.5: C1.13 80.01,113.386 80.031,113.407 U1.18
VP: C1.14 U1.17 | length 5.6
  Bottom Layer w0.5: C1.14 77.47,113.386 77.491,113.407 U1.17
pads on no net: C8.3 HD6.3 K5.NC K6.NC K7.NC S.3 U1.
copper on no net:
  other v1: 139.534,30.607

## Keep-outs
Keep-Out Layer:
  the board outline again, w0.254